# Altium PCB QTouch2.PcbDoc
Units mm, origin at the board's own origin, x right, y up, seen from the top; angles counter-clockwise.
Board outline 69.64 x 63.83 mm, 2 copper layers (Top Layer, Bottom Layer); 42 components, 42 nets, 124 pads, 0 vias.
Unrouted connection lines stored in the file: 76.
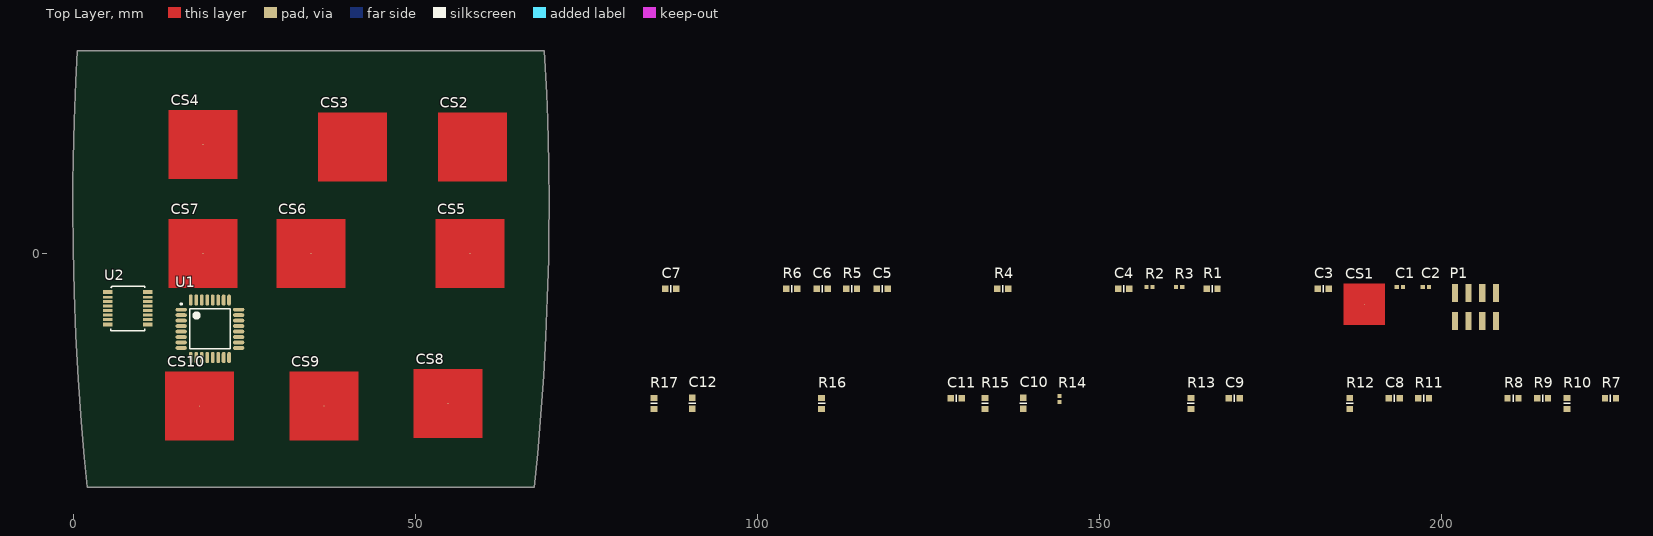
[diagram p0: Top Layer view]
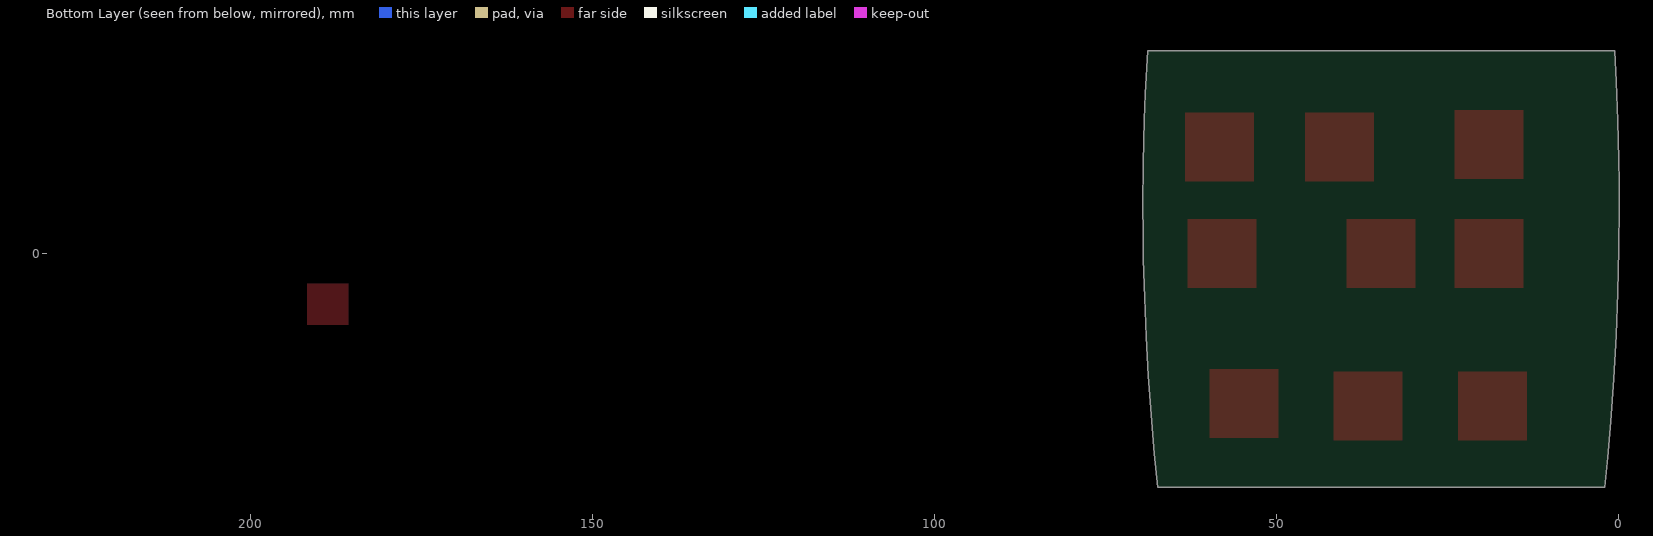
[diagram p1: Bottom Layer view, seen from below]

## Layer stack, top to bottom
Top Layer: signal copper 0.0356
Dielectric: dielectric 0.32, FR-4, Dk 4.8
Bottom Layer: signal copper 0.0356

## Board outline
0.746,-18.293 0.39,-11.97 0.136,-5.653 -0.016,0.644 -0.066,6.94 -0.051,10.34 -0.007,13.741 0.133,19.428 0.356,25.12 0.599,29.661 68.909,29.661 69.265,23.339 69.372,19.535 69.524,13.236 69.575,6.94 69.556,3.068 69.498,-0.804 69.344,-6.491 69.108,-12.184 68.789,-17.88 68.387,-23.576 67.903,-29.27 67.428,-34.169 2.091,-34.169 2.091,-34.145 1.654,-29.79 1.204,-24.616

## Design rules (kind name [scope] priority, off if disabled: settings)
Clearance [All] p1: gap=0.254
PolygonConnect [All] p1: connectstyle=Relief reliefconductorwidth=0.254 reliefentries=4 polygonreliefangle="90 Angle"
RoutingVias [All] p1: holewidth=0.711 width=1.27 viastyle="Through Hole" minholewidth=0.711 minwidth=1.27 maxholewidth=0.711 maxwidth=1.27
SilkscreenOverComponentPads [All] p1: minsilkscreentomaskgap=0.254
SolderMaskExpansion [All] p1: expansion=0.102
Width [All] p1: maxlimit=0.254 minlimit=0.254 preferedwidth=0.254
27 further rules are at their usual default settings.

## Components (designator, comment, footprint, x,y, rotation, side; value= is the part's Value field where it differs from the comment)
C1 "100nF" CAPC1005X55N 193.952,-4.898 r0 top
C2 "100nF" CAPC1005X55N 197.762,-4.898 r0 top
C3 "4.7nF" CAPC1608X87N 182.776,-5.152 r0 top
C4 "4.7nF" CAPC1608X87N 153.566,-5.152 r0 top
C5 "4.7nF" CAPC1608X87N 118.26,-5.152 r0 top
C6 "4.7nF" CAPC1608X87N 109.497,-5.152 r0 top
C7 "4.7nF" CAPC1608X87N 87.399,-5.152 r0 top
C8 "4.7nF" CAPC1608X87N 193.123,-21.152 r0 top
C9 "4.7nF" CAPC1608X87N 169.755,-21.152 r0 top
C10 "4.7nF" CAPC1608X87N 138.894,-21.914 r90 top
C11 "4.7nF" CAPC1608X87N 129.115,-21.152 r0 top
C12 "4.7nF" CAPC1608X87N 90.507,-21.914 r90 top
CS1 "QTouch Button" ?#1 188.745,-7.438 r0 top
CS2 "QTouch Button" ?#2 58.376,15.551 r0 top
CS3 "QTouch Button" ?#2 40.85,15.551 r0 top
CS4 "QTouch Button" ?#2 19.006,15.932 r0 top
CS5 "QTouch Button" ?#2 58,0 r0 top
CS6 "QTouch Button" ?#2 34.755,0 r0 top
CS7 "QTouch Button" ?#2 19,0 r0 top
CS8 "QTouch Button" ?#2 54.82,-21.914 r0 top
CS9 "QTouch Button" ?#2 36.659,-22.295 r0 top
CS10 "QTouch Button" ?#2 18.498,-22.295 r0 top
P1 "Header 8" "Header 2x4 SMD" 205.001,-7.819 r0 top
R1 "4k7" RESC1608X55N 166.52,-5.152 r0 top
R2 "100k" RESC1005X40N 157.376,-4.898 r0 top
R3 "100k" RESC1005X40N 161.694,-4.898 r0 top
R4 "4k7" RESC1608X55N 135.913,-5.152 r0 top
R5 "4k7" RESC1608X55N 113.815,-5.152 r0 top
R6 "4k7" RESC1608X55N 105.052,-5.152 r0 top
R7 "4k7" RESC1608X55N 224.746,-21.152 r0 top
R8 "0" RESC1608X55N 210.522,-21.152 r0 top
R9 "0" RESC1608X55N 214.84,-21.152 r0 top
R10 "0" RESC1608X55N 218.396,-21.914 r90 top
R11 "0" RESC1608X55N 197.441,-21.152 r0 top
R12 "4k7" RESC1608X55N 186.646,-21.914 r90 top
R13 "4k7" RESC1608X55N 163.405,-21.914 r90 top
R14 "100k" RESC1005X40N 144.228,-21.279 r90 top
R15 "4k7" RESC1608X55N 133.306,-21.914 r90 top
R16 "4k7" RESC1608X55N 109.43,-21.914 r90 top
R17 "4k7" RESC1608X55N 84.919,-21.914 r90 top
U1 "AT42QT1110-AZ" 32A_N 20,-11 r0 top
U2 "SC18IS602" TSSOP-16 8,-8 r270 top

## Footprints (in the part's own frame and the unit in brackets; to place one, negate y for a bottom-side part, rotate by r counter-clockwise, add the part's x,y. Pads: shape width x height; smd on the part's side, far side on the other; paste and mask are expansions set on the pad)
32A_N [mm] "Thin QFP, 32-Leads, Body 7x7mm, Pitch 0.8mm, IPC Medium Density"
  oval 1.65x0.55 smd: 1(-4.2,2.8) 2(-4.2,2) 3(-4.2,1.2) 4(-4.2,0.4) 5(-4.2,-0.4) 6(-4.2,-1.2) 7(-4.2,-2) 8(-4.2,-2.8) 17(4.2,-2.8) 18(4.2,-2) 19(4.2,-1.2) 20(4.2,-0.4) 21(4.2,0.4) 22(4.2,1.2) 23(4.2,2) 24(4.2,2.8)
  oval 0.55x1.65 smd: 9(-2.8,-4.2) 10(-2,-4.2) 11(-1.2,-4.2) 12(-0.4,-4.2) 13(0.4,-4.2) 14(1.2,-4.2) 15(2,-4.2) 16(2.8,-4.2) 25(2.8,4.2) 26(2,4.2) 27(1.2,4.2) 28(0.4,4.2) 29(-0.4,4.2) 30(-1.2,4.2) 31(-2,4.2) 32(-2.8,4.2)
  silkscreen extent -4.32,-2.95 2.95,3.75, body extent -3.5,-3.5 3.5,3.5, height 1.2
CAPC1005X55N [mm] "Chip Capacitor, Body 1.0x0.55mm, IPC Medium Density"
  rect 0.62x0.62 smd: 1(-0.45,0) 2(0.45,0)
  body extent -0.52,-0.27 0.53,0.28, height 0.55
CAPC1608X87N [mm] "Chip Capacitor, Body 1.6x0.8mm IPC Medium Density"
  rect 0.95x1 smd: 1(-0.8,0) 2(0.8,0)
  silkscreen extent 0,-0.5 0,0.5, body extent -0.87,-0.47 0.88,0.48, height 0.87
"Header 2x4 SMD" [mm]
  rect 0.9x2.6 smd: 1(-3,-2.05) 2(-3,2.05) 3(-1,-2.05) 4(-1,2.05) 5(1,-2.05) 6(1,2.05) 7(3,-2.05) 8(3,2.05)
  body extent -3.97,-3.25 3.97,3.25, height 6.5
RESC1005X40N [mm] "Chip Resistor, EIA 0402, Metric 1005, Body 1.0x0.5mm, IPC Medium Density"
  rect 0.6x0.6 smd: 1(-0.45,0) 2(0.45,0)
  body extent -0.52,-0.27 0.53,0.28, height 0.4
RESC1608X55N [mm] "Chip Resistor, EIA 0603, Metric 1608, Body 1.6x0.8mm, IPC Medium Density"
  rect 0.9x1 smd: 1(-0.8,0) 2(0.8,0)
  silkscreen extent 0,-0.5 0,0.5, body extent -0.87,-0.47 0.88,0.48, height 0.55
TSSOP-16 [mm]
  rect 0.6x1.35 smd: 1(-2.375,-2.925) 8(2.375,-2.925) 9(2.375,2.925) 16(-2.375,2.925)
  rect 0.4x1.35 smd: 2(-1.625,-2.925) 3(-0.975,-2.925) 4(-0.325,-2.925) 5(0.325,-2.925) 6(0.975,-2.925) 7(1.625,-2.925) 10(1.625,2.925) 11(0.975,2.925) 12(0.325,2.925) 13(-0.325,2.925) 14(-0.975,2.925) 15(-1.625,2.925)
  silkscreen extent -3.25,-2.5 3.25,2.5, body extent -2.5,-3.2 2.5,3.2, height 1
?#1 [mm]
  round 0.1 smd paste-0.05: 1(0,0)
  Top Layer region: -3,-3 -3,3 3,3 3,-3 -3,-3
?#2 [mm]
  round 0.1 smd paste-0.05: 1(0,0)
  Top Layer region: -5,-5 -5,5 5,5 5,-5 -5,-5

## Part data
C1 C2: library part CC0402_100NF_16V_10%_X7R, "Non-polarised capacitor"
C3 C4 C5 C6 C7 C8 C9 C10 C11 C12: library part CC0603_4.7NF_50V_10%_X7R, "Non-polarised capacitor"
CS1 CS2 CS3 CS4 CS5 CS6 CS7 CS8 CS9 CS10: library part QTouchButton
P1: "Header, 8-Pin"
R1 R4 R5 R6 R7 R12 R13 R15 R16 R17: library part R0603_4K7_1%_0.1W_100PPM, "Resistor - 1%"
R2 R3 R14: library part R0402_100K_1%_0.0625W_100PPM, "Resistor - 1%"
R8 R9 R10 R11: library part R0603_0R_JUMPER, "Resistor - 1%"
U1: "QTouch 11-key Sensor IC, 32-Pin TQFP"
U2: "I2C TO SPI NXP BRIDGE"

## Nets (pads, with @x,y where several pads share a name; then routed paths per layer and width w, separated by ;. In a path a pad name is that pad's centre, name@x,y a point inside that pad or via, vN(x,y) a via of type N, cw(c..) or ccw(c..) an arc to the next point about the centre after c; other vN are vias at no path point)
\Q\T\_\C\H\A\N\G\E\: P1.6 R2.1 U1.28
GND: C1.1 C2.1 P1.2 R8.2 R9.2 R10.2 R11.1 U1.5 U1.21 U2.4
INT: P1.7 R14.1 U2.9
NetC3_1: C3.1 U1.32
NetC3_2: C3.2 R1.1 U1.1
NetC4_1: C4.1 U1.2
NetC4_2: C4.2 R4.1 U1.3
NetC5_1: C5.1 U1.7
NetC5_2: C5.2 R5.1 U1.6
NetC6_1: C6.1 U1.8
NetC6_2: C6.2 R6.1 U1.9
NetC7_1: C7.1 U1.10
NetC7_2: C7.2 R7.1 U1.11
NetC8_1: C8.1 U1.12
NetC8_2: C8.2 R12.1 U1.13
NetC9_1: C9.1 U1.20
NetC9_2: C9.2 R13.1 U1.19
NetC10_1: C10.1 U1.23
NetC10_2: C10.2 R15.1 U1.22
NetC11_1: C11.1 U1.24
NetC11_2: C11.2 R16.1 U1.25
NetC12_1: C12.1 U1.26
NetC12_2: C12.2 R17.1 U1.27
NetCS1_1: CS1.1 R1.2
NetCS2_1: CS2.1 R4.2
NetCS3_1: CS3.1 R5.2
NetCS4_1: CS4.1 R6.2
NetCS5_1: CS5.1 R7.2
NetCS6_1: CS6.1 R12.2
NetCS7_1: CS7.1 R13.2
NetCS8_1: CS8.1 R15.2
NetCS9_1: CS9.1 R16.2
NetCS10_1: CS10.1 R17.2
NetR8_1: R8.1 R9.1 R10.1 U2.14 U2.15 U2.16
Q\T\_\R\S\T\: P1.5 R3.1 U1.29 U2.3
Q\T\_\S\S\: R11.2 U1.14 U2.1
QT_MISO: U1.16 U2.5
QT_MOSI: U1.15 U2.6
QT_SCK: U1.17 U2.11
QT_SCL: P1.4 U2.8
QT_SDA: P1.3 U2.7
VCC: C1.2 C2.2 P1.1 R2.2 R3.2 R14.2 U1.4 U1.18 U2.12
pads on no net: P1.8 U1.30 U1.31 U2.2 U2.10 U2.13

## Silkscreen, mask and mechanical layers (free items; w line width, h text height)
Mechanical 1:
  lines w0.5: 2.091,-34.169 64.566,-34.169 67.428,-34.169 67.903,-29.27 68.387,-23.576 68.789,-17.88 69.108,-12.184 69.344,-6.491 69.498,-0.804 69.556,3.068 69.575,6.94 69.524,13.236 69.372,19.535 69.265,23.339 68.909,29.661 0.599,29.661 0.356,25.12 0.133,19.428 -0.007,13.741 -0.051,10.34 -0.066,6.94 -0.016,0.644 0.136,-5.653 0.39,-11.97 0.746,-18.293 1.204,-24.616 1.654,-29.79 2.091,-34.145
Mechanical 2:
  lines w0.127: 0.369,24.484 6.069,24.484 ; 3.219,21.634 3.219,27.334 ; 63.118,24.484 68.818,24.484 ; 65.968,21.634 65.968,27.334
Mechanical 7:
  circle w0.127: c3.219,24.484 r1.6
  circle w0.127: c65.968,24.484 r1.6